# Altium PCB Vexter_PCB.PcbDoc
Units mm, origin at the board's own origin, x right, y up, seen from the top; angles counter-clockwise.
Board outline 30 x 15 mm, 2 copper layers (Top Layer, Bottom Layer), stack 1.569 mm thick; 24 components, 20 nets, 72 pads, 117 vias.
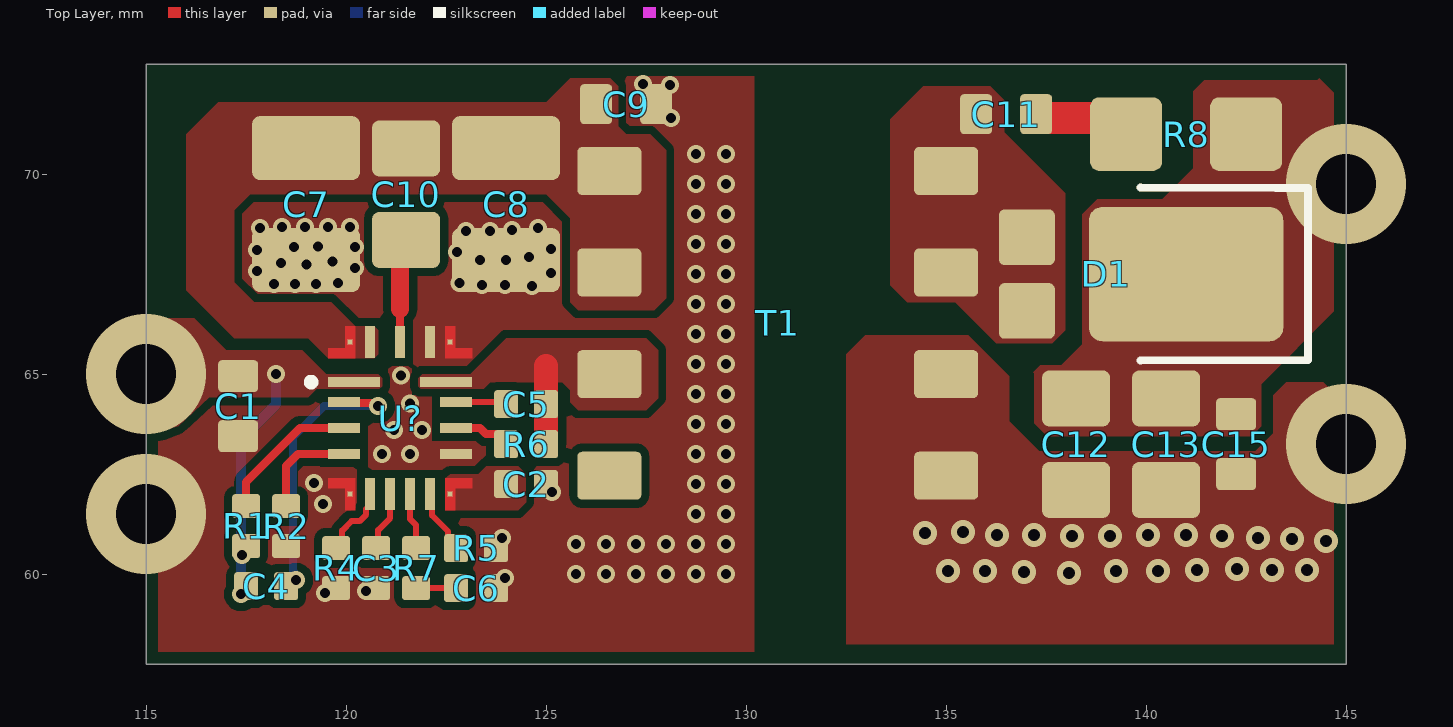
[diagram p0: Top Layer view]
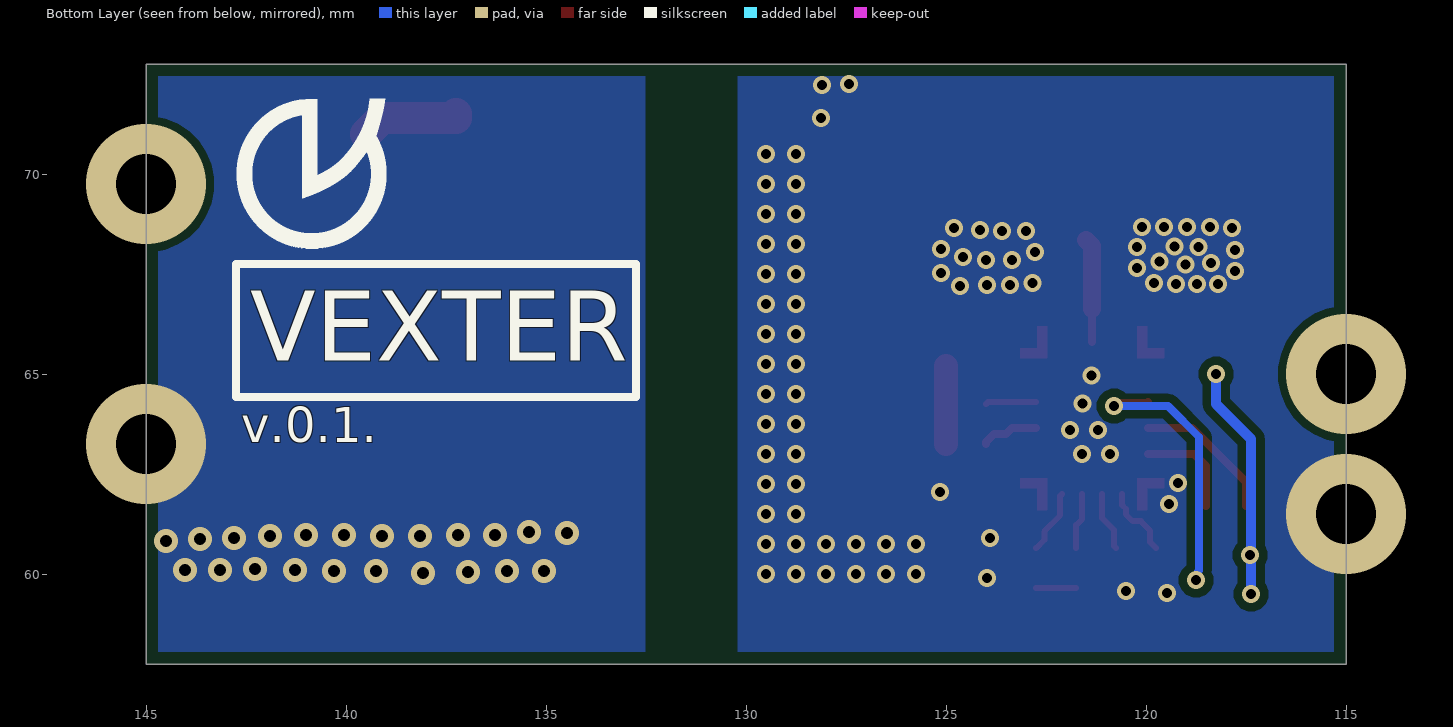
[diagram p1: Bottom Layer view, seen from below]
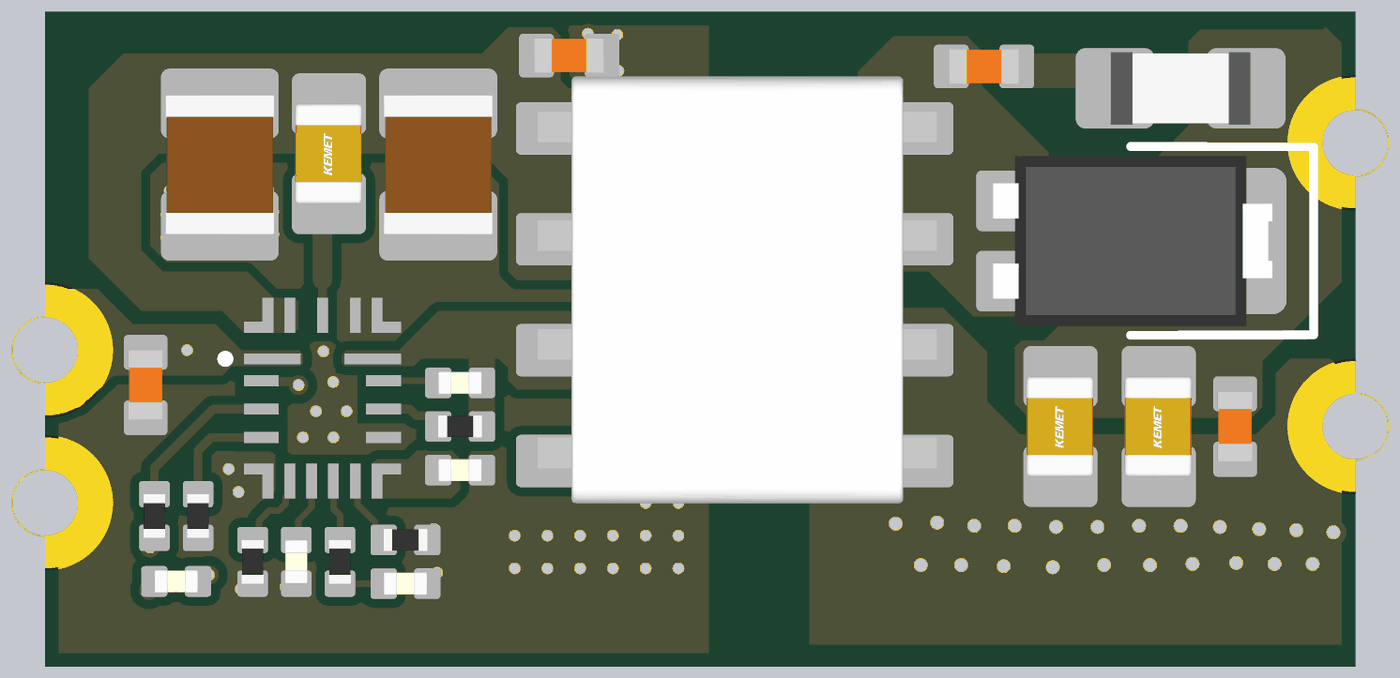
[diagram p2: 3D render of the assembled board from above, using the file's embedded part models]

## Layer stack, top to bottom
Top Solder: solder mask 0.0254, SM-001, Dk 4
Top Layer: signal copper 0.035
Dielectric 1: core 1.4986, Core-043, Dk 4.3
Bottom Layer: signal copper 0.035
Bottom Solder: solder mask 0.0254, SM-001, Dk 4

## Board outline
115,72.75 145,72.75 145,57.75 115,57.75

## Design rules (kind name [scope] priority, off if disabled: settings)
BoardOutlineClearance [All] p1: gap=0.3 ignorepadtopadclearanceinfootprint=FALSE
Clearance [All] p1: gap=0.203 ignorepadtopadclearanceinfootprint=TRUE except(0.254: Arc-Hole Track-Hole SMDPad-Hole THPad-Hole Via-Hole Fill-Hole Poly-Hole Region-Hole Text-Hole)
ComponentClearance [All] p1: gap=0.127 collisioncheckmode=3 verticalgap=0.127 showdistances=TRUE
DiffPairsRouting [All] p1: maxlimit=0.381 minlimit=0.203 mostfreqgap=0.203 toplayer_minwidth=0.203 toplayer_maxwidth=25.4 toplayer_prefwidth=0.203 bottomlayer_minwidth=0.203 bottomlayer_maxwidth=25.4 bottomlayer_prefwidth=0.203 maxuncoupledlength=12.7
Height [All] p1: minheight=0 maxheight=1816.048 prefheight=12.7
HoleSize [All] p1: absolutevalues=TRUE maxlimit=6.3 minlimit=0.3 maxpercent=80.000 minpercent=20.000
HoleToHoleClearance [All] p1: gap=0.254 allowstackedmicrovias=FALSE
MinimumAnnularRing [All] p1: minimumring=0.152
MinimumSolderMaskSliver [All] p1: minsoldermaskwidth=0.152
PlaneClearance [All] p1: clearance=0.203
PlaneConnect PlaneConnectPowerPads [InPadClass('PowerPads')] p1: planeconnectstyle=Direct reliefexpansion=0.508 reliefentries=4 reliefconductorwidth=0.254 reliefairgap=0.254
PlaneConnect [All] p2: pad.planeconnectstyle=Relief pad.reliefexpansion=0.3 pad.reliefentries=4 pad.reliefconductorwidth=0.203 pad.reliefairgap=0.203 via.planeconnectstyle=Direct via.reliefexpansion=0.3 via.reliefentries=4 via.reliefconductorwidth=0.127 via.reliefairgap=0.127
PolygonConnect PolygonConnectPowerPads [All vs (InPadClass('PowerPads'))] p1: connectstyle=Direct reliefconductorwidth=0.254 reliefentries=4 polygonreliefangle="90 Angle" airgapwidth=0.254
PolygonConnect [All] p2: thpad.connectstyle=Relief thpad.reliefconductorwidth=0.203 thpad.reliefentries=4 thpad.polygonreliefangle="90 Angle" thpad.airgapwidth=0.203 smdpad.connectstyle=Direct smdpad.reliefconductorwidth=0.203 smdpad.reliefentries=4 smdpad.polygonreliefangle="90 Angle" smdpad.airgapwidth=0.203 via.connectstyle=Direct via.reliefconductorwidth=0.127 via.reliefentries=4 via.polygonreliefangle="90 Angle" via.airgapwidth=0.127
RoutingVias [All] p1: holewidth=0.3 width=0.6 viastyle="Through Hole" minholewidth=0.3 minwidth=0.6 maxholewidth=0.6 maxwidth=6.6
SilkToSilkClearance [All] p1: silktosilkclearance=0.127
SilkToSolderMaskClearance [IsPad] p1: minsilkscreentomaskgap=0.127 clearancetoexposedcopper=TRUE
SolderMaskExpansion [All] p1: expansion=0.051 istentingtop=FALSE
UnRoutedNet [All] p1: checkbadconnections=TRUE
Width Power_20mil [All] p1: maxlimit=2 minlimit=0.1 preferedwidth=0.3
19 further rules are at their usual default settings.

## Components (designator, comment, footprint, x,y, rotation, side; value= is the part's Value field where it differs from the comment)
C1 "100n" CAP_0603 117.3,64.2 r90 top
C2 "2u2" CAP_0402 124.5,62.25 r180 top
C3 "220n" CAP_0402 120.75,60.15 r90 top
C4 "220n" CAP_0402 118,59.7 r180 top
C5 "220n" CAP_0402 124.5,64.25 r180 top
C6 "22n" CAP_0402 123.25,59.65 r180 top
C7 "2u2" CAP_1210 119,69.25 r90 top
C8 "2u2" CAP_1210 124,69.25 r90 top
C9 "10n" CAP_0603 127,71.75 r180 top
C10 "4u7" CAP_0805 121.5,69.5 r90 top
C11 "470p" CAP_0603 136.5,71.5 r0 top
C12 "22u" CAP_0805 138.25,63.25 r90 top
C13 "22u" CAP_0805 140.5,63.25 r90 top
C15 "100n" CAP_0603 142.25,63.25 r90 top
D1 "SBR8U60P5-13" PowerDI5-3 141,67.5 r270 top
R1 "24k9" RES_0402 117.5,61.2 r270 top
R2 "41R2" RES_0402 118.5,61.2 r90 top
R4 "9k31" RES_0402 119.75,60.15 r90 top
R5 "150k" RES_0402 123.25,60.65 r180 top
R6 "249k" RES_0402 124.5,63.25 r0 top
R7 "1k" RES_0402 121.75,60.15 r90 top
R8 "10R" RES_1206 141,71 r0 top
T1 "55uH" TWPEP090909B300T 126.58,70.08 r270 top
U? "MP8017GL-P" "QFN-19 (3mmx4mm)" 121.35,63.9 r0 top

## Footprints (in the part's own frame and the unit in brackets; to place one, negate y for a bottom-side part, rotate by r counter-clockwise, add the part's x,y. Pads: shape width x height; smd on the part's side, far side on the other; paste and mask are expansions set on the pad)
CAP_0402 [mm]
  rrect25% 0.6x0.7 smd mask+0: 1(-0.5,0) 2(0.5,0)
  body extent -0.5,-0.26 0.5,0.27, height 0.37
CAP_0603 [mm]
  rrect25% 0.8x1 smd mask+0: 1(-0.75,0) 2(0.75,0)
  body extent -0.8,-0.4 0.8,0.4, height 0.51
CAP_0805 [mm]
  rrect25% 1.4x1.7 smd mask+0: 1(-1.143,0) 2(1.143,0)
  body extent -1.15,-0.76 1.15,0.79, height 1.01
CAP_1210 [mm]
  rrect25% 1.6x2.7 smd mask+0: 1(-1.4,0) 2(1.4,0)
  body extent -1.6,-1.25 1.6,1.25, height 2.5
PowerDI5-3 [mm]
  rrect20% 1.39x1.4 smd mask+0: A(-0.92,-3.982) A(0.92,-3.982)
  rrect20% 3.36x4.86 smd mask+0: K(0,0)
  silkscreen extent -2.17,-1.14 2.16,3.05, body extent -1.95,-4.29 1.95,2.11, height 1.05
"QFN-19 (3mmx4mm)" [mm]
  rect 1.3x0.25 smd paste+0 mask+0: 1(-1.15,0.9) 14(1.15,0.9)
  rect 0.8x0.25 smd paste+0 mask+0: 2(-1.4,0.4) 3(-1.4,-0.25) 4(-1.4,-0.9) 11(1.4,-0.9) 12(1.4,-0.25) 13(1.4,0.4)
  rect 0.127x0.127 smd paste-0.064 mask-0.064: 5(-1.25,-1.9) 10(1.25,-1.9) 15(1.25,1.9) 19(-1.25,1.9)
  rect 0.25x0.8 smd paste+0 mask+0: 6(-0.75,-1.9) 7(-0.25,-1.9) 8(0.25,-1.9) 9(0.75,-1.9) 16(0.75,1.9) 17(0,1.9) 18(-0.75,1.9)
  Top Layer region: -1.375,1.75 -1.375,2.3 -1.125,2.3 -1.125,1.5 -1.8,1.5 -1.8,1.75
  Top Layer region: -1.375,-1.75 -1.375,-2.3 -1.125,-2.3 -1.125,-1.5 -1.8,-1.5 -1.8,-1.75
  Top Layer region: 1.375,-1.75 1.375,-2.3 1.125,-2.3 1.125,-1.5 1.8,-1.5 1.8,-1.75
  Top Layer region: 1.375,1.75 1.375,2.3 1.125,2.3 1.125,1.5 1.8,1.5 1.8,1.75
  silkscreen extent -2.28,0.84 -2.17,0.96
RES_0402 [mm]
  rrect25% 0.6x0.7 smd mask+0: 1(-0.5,0) 2(0.5,0)
  body extent -0.5,-0.25 0.5,0.25, height 0.3
RES_1206 [mm]
  rrect25% 1.8x1.84 smd mask+0: 1(-1.5,0) 2(1.5,0)
  body extent -1.6,-0.83 1.6,0.83, height 0.57
TWPEP090909B300T [mm]
  rrect20% 1.2x1.6 smd mask+0: 1(0,0) 2(2.54,0) 3(5.08,0) 4(7.62,0) 5(7.62,8.42) 6(5.08,8.42) 7(2.54,8.42) 8(0,8.42)
  body extent -1.19,-0.3 8.59,8.84, height 10.6

## Part data
C1: library part CAP_100n_0603_100V_10%_X7R, "Capacitor SMD 100n 0603 50V 10% X7R", Manufacturer="Samsung Electro-Mechanics", Part Number=CL10B104KC8NNNC, Distributor Link=https://cz.mouser.com/ProductDetail/Samsung-Electro-Mechanics/CL10B104KC8NNNC?qs=sGAEpiMZZMvsSlwiRhF8qrStdQmkkjBl%2FQhwBGJ%2FxFbl1yCQ6UBl3A%3D%3D, Generic?=Yes, Obsolete?=No, Parameters=100n_0603_100V_10%_X7R
C2: library part CAP_2u2_0402_35V_10%_X5R, "Capacitor SMD 2u2 0402 35V 10% X5R", Manufacturer=Murata, Part Number=GRM155R6YA225KE11D, Distributor Link=https://cz.mouser.com/ProductDetail/Murata-Electronics/GRM155R6YA225KE11D?qs=sGAEpiMZZMvsSlwiRhF8qtbaqYG%252B%252Bbbwp%252BrKmbG5LFQ9nM4QIaoJFg%3D%3D, Generic?=Yes, Obsolete?=No, Parameters=2u2_0402_35V_10%_X5R
C3 C4 C5: library part CAP_220n_0402_25V_10%_X5R, "Capacitor SMD 220n 0402 25V 10% X5R", Manufacturer=Murata, Part Number=GRT155R61E224KE01D, Distributor Link=https://cz.mouser.com/ProductDetail/Murata-Electronics/GRT155R61E224KE01D?qs=drgMNd%252BkGPMmDaNrMlXt5Q%3D%3D, Generic?=Yes, Obsolete?=No, Parameters=220n_0402_25V_10%_X5R
C6: library part CAP_22n_0402_25V_10%_X7R, "Capacitor SMD 22n 0402 25V 10% X7R", Manufacturer=TDK, Part Number=C1005X7R1E223K050BB, Distributor Link=https://cz.mouser.com/ProductDetail/TDK/C1005X7R1E223K050BB?qs=sGAEpiMZZMvsSlwiRhF8qsDt8B2LujiHv9ZMBJ9wABM%3D, Generic?=Yes, Obsolete?=No, Parameters=22n_0402_25V_10%_X7R
C7 C8: library part CAP_2u2_1210_100V_10%_X7R, "Capacitor SMD 2u2 1210 100V 10% X7R", Manufacturer="Samsung Electro-Mechanics", Part Number=CL32B225KCJSNNE, Distributor Link=https://cz.mouser.com/ProductDetail/Samsung-Electro-Mechanics/CL32B225KCJSNNE?qs=X6jEic%2FHinBTqQESZCUGKg%3D%3D, Generic?=Yes, Obsolete?=No, Parameters=2u2_1210_100V_10%_X7R
C9: library part CAP_10n_0603_100V_10%_X7R, "Capacitor SMD 10n 0603 100V 10% X7R", Manufacturer=Murata, Part Number=GRM188R72A103KA01D, Distributor Link=https://cz.mouser.com/ProductDetail/Murata-Electronics/GRM188R72A103KA01D?qs=krk%2F6UQjCzAtl9phuocbug%3D%3D, Generic?=Yes, Obsolete?=No, Parameters=10n_0603_100V_10%_X7R
C10: library part CAP_4u7_0805_50V_10%_X7R, "Capacitor SMD 4u7 0805 50V 10% X7R", Manufacturer=TDK, Part Number=CGA4J1X7R1H475K125AC, Distributor Link=https://cz.mouser.com/ProductDetail/TDK/CGA4J1X7R1H475K125AC?qs=PqoDHHvF64%252BmskN2S82T2g%3D%3D, Generic?=Yes, Obsolete?=No, Parameters=4u7_0805_50V_10%_X7R
C11: library part CAP_470p_0603_100V_10%_X7R, "Capacitor SMD 470p 0603 100V 10% X7R", Manufacturer="Samsung Electro-Mechanics", Part Number=CL10B471KC85PNC, Distributor Link=https://cz.mouser.com/ProductDetail/Samsung-Electro-Mechanics/CL10B471KC85PNC?qs=sGAEpiMZZMvsSlwiRhF8qtsGU%2FCnaNeQLkPpNmVwyB%2FzM%252BHMhfj7Ng%3D%3D, Generic?=Yes, Obsolete?=No, Parameters=470p_0603_100V_10%_X7R
C12 C13: library part CAP_22u_0805_25V_20%_X5R, "Capacitor SMD 22u 0805 25V 20% X5R", Manufacturer="Samsung Electro-Mechanics", Part Number=CL21A226MAYNNNE, Distributor Link=https://cz.mouser.com/ProductDetail/Samsung-Electro-Mechanics/CL21A226MAYNNNE?qs=sGAEpiMZZMvsSlwiRhF8qtsGU%2FCnaNeQwDZ09%252BwQGHm28IfOP7W13g%3D%3D, Generic?=Yes, Obsolete?=No, Parameters=22u_0805_25V_20%_X5R
C15: library part CAP_100n_0603_50V_10%_X7R, "Capacitor SMD 100n 0603 50V 10% X7R", Manufacturer="Samsung Electro-Mechanics", Part Number=CL10B104KB8NNND, Distributor Link=https://cz.mouser.com/ProductDetail/Samsung-Electro-Mechanics/CL10B104KB8NNND?qs=sGAEpiMZZMvsSlwiRhF8qlxW52pIu5FNK3tKzcUaj3w%3D, Generic?=Yes, Obsolete?=No, Parameters=100n_0603_50V_10%_X7R
D1: library part D_SCHOTTKY_60V_8A_Vf_530mV_PowerDI5-3, "Schottky Rectifier, Super Barrier, 60 V, 8 A, Single, PowerDI 5, 3 Pins, 530 mV", Manufacturer="Diodes Incorporated", Datasheet=https://cz.mouser.com/datasheet/2/115/DIODS18049_1-2541727.pdf, Distributor Link=https://cz.mouser.com/ProductDetail/Diodes-Incorporated/SBR8U60P5-13?qs=nSryOFbzj8LdQMI0wTayiw%3D%3D, Generic?=No, Obsolete?=No, Part Number=SBR8U60P5-13
R1: library part RES_24k9_0402_1%, "Resistor 24k9 0402 1%", Manufacturer=Bourns, Part Number=CR0402-FX-2492GLF, Distributor Link=https://cz.mouser.com/ProductDetail/Bourns/CR0402-FX-2492GLF?qs=sGAEpiMZZMvdGkrng054t%252BRNGJdg958Rh%252BomGKLrvyo%3D, Generic?=Yes, Obsolete?=No, Parameters=24k9_0402_1%
R2: library part RES_41R2_0402_1%, "Resistor SMD 41R2 0402 1%", Manufacturer=Panasonic, Part Number=ERJ-2RKF41R2X, Distributor Link=https://cz.mouser.com/ProductDetail/Panasonic/ERJ-2RKF41R2X?qs=sGAEpiMZZMtlubZbdhIBIH%2FX%2FXYrlp18YchEzQnu88Q%3D, Generic?=Yes, Obsolete?=No, Parameters=41R2_0402_1%
R4: library part RES_9k31_0402_1%, "Resistor SMD 9k31 0402 1%", Manufacturer=Bourns, Part Number=CR0402-FX-9311GLF, Distributor Link=https://cz.mouser.com/ProductDetail/Bourns/CR0402-FX-9311GLF?qs=sGAEpiMZZMtlubZbdhIBIA2l6dSgzpPWGjfmsvBq%252BNI%3D, Generic?=Yes, Obsolete?=No, Parameters=9k31_0402_1%
R5: library part RES_150k_0402_1%, "Resistor SMD 150k 0402 1%", Manufacturer=Walsin, Part Number=WR04X1503FTL, Distributor Link=https://cz.mouser.com/ProductDetail/Walsin/WR04X1503FTL?qs=sGAEpiMZZMtlubZbdhIBIO6gLQ25xNI8CUhgfgRPVZc%3D, Generic?=Yes, Obsolete?=No, Parameters=150k_0402_1%
R6: library part RES_249k_0402_1%, "Resistor SMD 249k 0402 1%", Manufacturer=YAGEO, Part Number=RC0402FR-07249KL, Distributor Link=https://cz.mouser.com/ProductDetail/YAGEO/RC0402FR-07249KL?qs=sGAEpiMZZMvdGkrng054t9CkWbSRI0EFS47avGl7FQg%3D, Generic?=Yes, Obsolete?=No, Parameters=249k_0402_1%
R7: library part RES_1k_0402_0.5%, "Resistor SMD 1k 0402 0.5%", Manufacturer=Bourns, Part Number=CRT0402-DY-1001GLF, Distributor Link=https://cz.mouser.com/ProductDetail/Bourns/CRT0402-DY-1001GLF?qs=9qK3lZr%252Bi0KXQwdtUA3%2FBw%3D%3D, Generic?=Yes, Obsolete?=No, Parameters=1k_0402_0.5%
R8: library part RES_10R_1206_1%, "Resistor SMD 10R 1206 1%", Manufacturer=YAGEO, Part Number=RC1206FR-0710RL, Distributor Link=https://cz.mouser.com/ProductDetail/YAGEO/RC1206FR-0710RL?qs=%2F8M1ehdqYDBdV11LXpIrWA%3D%3D, Generic?=Yes, Obsolete?=No, Parameters=10R_1206_1%
T1: library part TRN_FLYBACK_57V_12V_1A_EP7
U?: library part PM_POE_57V_12W_FLYBACK_QFN19, "IEEE 802.3af-Compliant PoE PD Solution with Primary- or Secondary-Side Regulation Active-Clamp Flyback Converter", Manufacturer="Monolithic Power Systems (MPS)", Datasheet=https://www.monolithicpower.com/en/documentview/productdocument/index/version/2/document_type/Datasheet/lang/en/sku/MP8017GL/document_id/9827/, Distributor Link=https://www.monolithicpower.com/en/mp8017.html, Generic?=No, Obsolete?=No, Part Number=MP8017GL-P

## Via types
v1: diameter 0.45, hole 0.25, Top Layer to Bottom Layer, tented both sides, 91 vias
v2: diameter 0.6, hole 0.3, Top Layer to Bottom Layer, tented both sides, 22 vias
v3: diameter 3/3 (per signal layer), hole 1.5, Top Layer to Bottom Layer, 4 vias

## Nets (pads, with @x,y where several pads share a name; then routed paths per layer and width w, separated by ;. In a path a pad name is that pad's centre, name@x,y a point inside that pad or via, vN(x,y) a via of type N, cw(c..) or ccw(c..) an arc to the next point about the centre after c; other vN are vias at no path point)
+12V: C12.2 C13.2 C15.2 D1.K R8.2
  other v3: 145,69.75
MP_BST: C5.2 U?.13 | length 1.3
  Top Layer w0.15: U?.13 123.95,64.3 C5.2
MP_CLASS: R2.2 U?.4 | length 2.6
  Top Layer w0.2: R2.2 118.5,62.7 118.8,63 U?.4
MP_COMP: R7.2 U?.8 | length 1.4
  Top Layer w0.15: U?.8 121.6,61.375 121.75,61.225 R7.2
MP_DET: R1.1 U?.3 | length 3.6
  Top Layer w0.2: R1.1 117.5,62.3 118.85,63.65 U?.3
MP_DIODE: R5.2 U?.9 | length 1.6
  Top Layer w0.15: U?.9 122.15,61.95 122.15,61.466 122.546,61.07 122.546,60.854 R5.2
MP_FB: R6.1 U?.12 | length 1.4
  Top Layer w0.2: U?.12 123.35,63.65 123.5,63.5 123.8,63.5 124,63.3 R6.1
MP_FSW: R4.2 U?.6 | length 1.8
  Top Layer w0.15: R4.2 119.899,60.799 119.899,61.087 120.133,61.322 120.34,61.322 120.503,61.485 120.503,61.628 120.6,61.725 U?.6
MP_SNBR: C10.1 U?.17 | length 2.6
  Top Layer w0.2: U?.17 121.35,66.625
  Top Layer w0.45: 121.35,66.625 121.35,68.207 C10.1
MP_SS: C3.2 U?.7 | length 1.5
  Top Layer w0.15: C3.2 120.8,60.7 120.8,61.1 121.1,61.4 U?.7
MP_SW: C5.1 R6.2 T1.3 U?.14 | length 1.9
  Top Layer w0.6: R6.2 125,65.2
MP_VCC: C2.2 U?.10
NetC4_1: C4.1 U?.2 | length 6.9
  Top Layer w0.2: U?.2 119.968,64.282 120.65,64.282 120.732,64.2 v1(120.8,64.2)
  Bottom Layer w0.2: v1(118.75,59.85) 118.702,59.898 118.702,60.062 118.672,60.092 118.672,63.422 119.45,64.2 v1(120.8,64.2)
NetC6_2: C6.2 R7.1 | length 1
  Top Layer w0.15: R7.1 C6.2
NetC11_1: C11.1 D1.A T1.7 T1.8
NetC11_2: C11.2 R8.1 | length 2.5
  Top Layer w0.8: C11.2 137.25,71.4 139.1,71.4 R8.1
PGND: C1.1 C2.1 C3.1 C6.1 C7.1 C8.1 C9.1 R2.1 R4.1 R5.1 U?.5 U?.11 U?.15 U?.16
  other v1: 119.475,59.525 120.5,59.575 123.975,59.9 125.75,60 126.5,60 127.25,60 128,60 128.75,60 129.5,60 125.75,60.75 126.5,60.75 127.25,60.75 128,60.75 128.75,60.75 129.5,60.75 123.9,60.9 128.75,61.5 129.5,61.5 119.425,61.75 125.15,62.05 128.75,62.25 129.5,62.25 119.2,62.275 120.9,63 121.6,63 128.75,63 129.5,63 121.2,63.6 121.9,63.6 128.75,63.75 129.5,63.75 121.594,64.27 128.75,64.5 129.5,64.5 121.372,64.971 128.75,65.25 129.5,65.25 128.75,66 129.5,66 128.75,66.75 129.5,66.75 124.65,67.2 123.4,67.225 123.975,67.225 118.2,67.25 118.725,67.25 119.25,67.25 119.8,67.275 122.839,67.276 128.75,67.5 129.5,67.5 125.125,67.525 117.775,67.575 120.225,67.65 119.013,67.738 118.375,67.775 119.663,67.811 123.35,67.85 124,67.85 124.575,67.925 122.778,68.05 117.775,68.1 125.125,68.125 118.696,68.178 120.222,68.175 119.292,68.188 128.75,68.25 129.5,68.25 123,68.575 123.6,68.575 124.15,68.6 117.85,68.65 124.8,68.65 118.4,68.675 118.975,68.675 119.55,68.675 120.1,68.675 128.75,69 129.5,69 128.75,69.75 129.5,69.75 128.75,70.5 129.5,70.5 128.125,71.4 127.425,72.25 128.1,72.225
  other v3: 115,61.5
PoE_VCC: C1.2 C4.2 R1.2 U?.1 | length 5.9
  Bottom Layer w0.254: v1(117.375,59.5) 117.375,63.375 118.25,64.25 v1(118.25,65)
  other v1: 117.4,60.475
  other v3: 115,65
SGND: C12.1 C13.1 C15.1 T1.5 T1.6
  other v2: 138.075,60.025 136.95,60.05 135.05,60.075 135.975,60.075 139.25,60.075 140.3,60.075 141.275,60.1 143.15,60.1 144.025,60.1 142.275,60.125 144.5,60.825 143.65,60.875 142.8,60.9 138.15,60.95 139.1,60.95 141.9,60.95 136.275,60.975 137.2,60.975 140.05,60.975 141,60.975 134.475,61.025 135.425,61.05
  other v3: 145,63.25
TR_IN: C7.2 C8.2 C9.2 C10.2 T1.1 T1.2 U?.18 U?.19
pads on no net: T1.4

## Polygon pours and split planes (outlines as drawn)
SGND on Top Layer "SGND_L01_P010" (solid, pour order 10): 132.5,65.5 132.5,58.25 144.8,58.25 144.8,64.425 144.425,64.8 143.5,64.8 143.175,64.475 143.175,63.525 142.725,63.075 137.325,63.075 136.575,63.825 136.575,64.95 135.55,65.975 133.9,65.975 132.975,65.975
PGND on Top Layer "PGND_L01_P013" (solid, remove dead copper, pour order 13): 114.979,72.863 130.204,72.863 130.204,57.75 114.979,57.75 114.979,72.838
+12V on Top Layer "+12V_L01_P009" (solid, pour order 9): 137.2,63.775 137.25,63.725 137.55,63.425 137.575,63.45 142.625,63.45 142.875,63.7 142.875,64.75 144.975,66.85 144.975,71.75 144.325,72.4 144.275,72.35 141.45,72.35 141.175,72.075 141.175,70.15 140.4,69.375 138.775,69.375 138.4,69 138.4,65.75 137.875,65.225 137.35,65.225 137.175,65.05 137.2,65.025 137.2,64.175
NetC11_1 on Top Layer "NETC11_1_L01_P008" (solid, pour order 8): 134.025,66.8 135.225,66.8 136.25,65.775 137.65,65.775 137.975,66.1 137.975,69.525 136.45,71.05 136.45,71.85 136.1,72.2 134.425,72.2 133.6,71.375 133.6,67.225
PGND on Top Layer "PGND_L01_P006" (solid, pour order 6): 123.15,62.875 122.225,62.875 121.975,62.625 120.775,62.625 120.55,62.85 120.55,63.525 120.9,63.875 121.125,63.875 121.2,63.95 121.2,64.65 121.025,64.825 121.025,65.15 121.125,65.25 121.55,65.25 121.825,65.525 121.95,65.4 121.95,65.35 121.683,65.083 121.683,64.617 122.2,64.1 122.2,63.3 122.35,63.15 123.125,63.15 123.125,62.925 123.15,62.9
PGND on Top Layer "PGND_L01_P005" (solid, pour order 5): 120.225,62.4 120.225,61.6 119.8,61.6 119.175,60.975 119.175,60.55 118.925,60.3 118.2,60.3 118.075,60.425 118.075,60.975 118.275,61.175 118.875,61.175 119.075,61.375 119.075,62.15 119.325,62.4
PGND on Top Layer "PGND_L01_P004" (solid, pour order 4): 122.525,67.3 121.825,66.6 121.825,65.525 121.95,65.4 123.175,65.4 124.125,66.35 124.9,66.35 125.45,66.9 125.45,68.725 125.1,69.075 122.875,69.075 122.525,68.725 122.525,68.475
TR_IN on Top Layer "TR_IN_L01_P003" (solid, pour order 3): 120.225,66.2 120.7,66.2 120.8,66.1 120.8,65.5 120.7,65.4 119.55,65.4 119.05,65.9 117.2,65.9 116,67.1 116,71 116.8,71.8 125,71.8 125.6,72.4 126.6,72.4 126.8,72.2 126.8,71.2 127,71 127.6,71 128,70.6 128,66.9 127.7,66.6 125.8,66.6 125.6,66.8 125.6,68.9 125,69.5 117.6,69.5 117.2,69.1 117.2,67.3 117.7,66.8 119.625,66.8
PoE_VCC on Top Layer "POE_VCC_L01_P002" (solid, pour order 2): 116.581,64.421 119.054,64.421 119.267,64.633 120.833,64.633 120.9,64.7 120.9,64.9 120.8,65 119.5,65 119.1,65.4 118.9,65.6 117,65.6 116.2,66.4 115.1,66.4 115.1,63.5 115.8,63.7
MP_SW on Top Layer "MP_SW_L01_P001" (solid, pour order 1): 123.436,64.636 123.6,64.8 125.4,64.8 125.6,64.6 125.6,64.3 125.8,64.1 127.5,64.1 127.8,64.4 127.8,65.6 127.5,65.9 124,65.9 123.1,65 121.9,65 121.8,64.9 121.8,64.7 121.864,64.636
MP_VCC on Top Layer "MP_VCC_L01_P000" (solid, pour order 0): 122.6,62.5 123.3,62.5 123.5,62.7 124.3,62.7 124.5,62.5 124.5,61.8 124.3,61.6 122.475,61.6 122.475,62.4
SGND on Bottom Layer "SGND_L02_P016" (solid, pour order 16): 132.516,57.75 144.991,57.75 144.991,72.76 132.516,72.76
PGND on Bottom Layer "PGND_L02_P012" (solid, remove dead copper, pour order 12): 114.985,72.855 130.21,72.855 130.21,57.75 114.985,57.75 114.985,72.83

## Silkscreen, mask and mechanical layers (free items; w line width, h text height)
Bottom Overlay:
  drawing of 6 lines, arcs and shapes, not listed
  text "VEXTER" at 142.4,64.762 h3
  text "v.0.1." at 142.625,63.003 h1.5
Mechanical 1:
  lines w0.2: 115,57.75 126.5,57.75 145,57.75 145,72.75 115,72.75 115,57.75